# Altium PCB Project Dial MLB attiny.PcbDoc
Units mil, origin at the board's own origin, x right, y up, seen from the top; angles counter-clockwise.
Board outline 2539.04 x 2600.62 mil, 2 copper layers (Top Layer, Bottom Layer); 24 components, 15 nets, 74 pads, 38 vias.
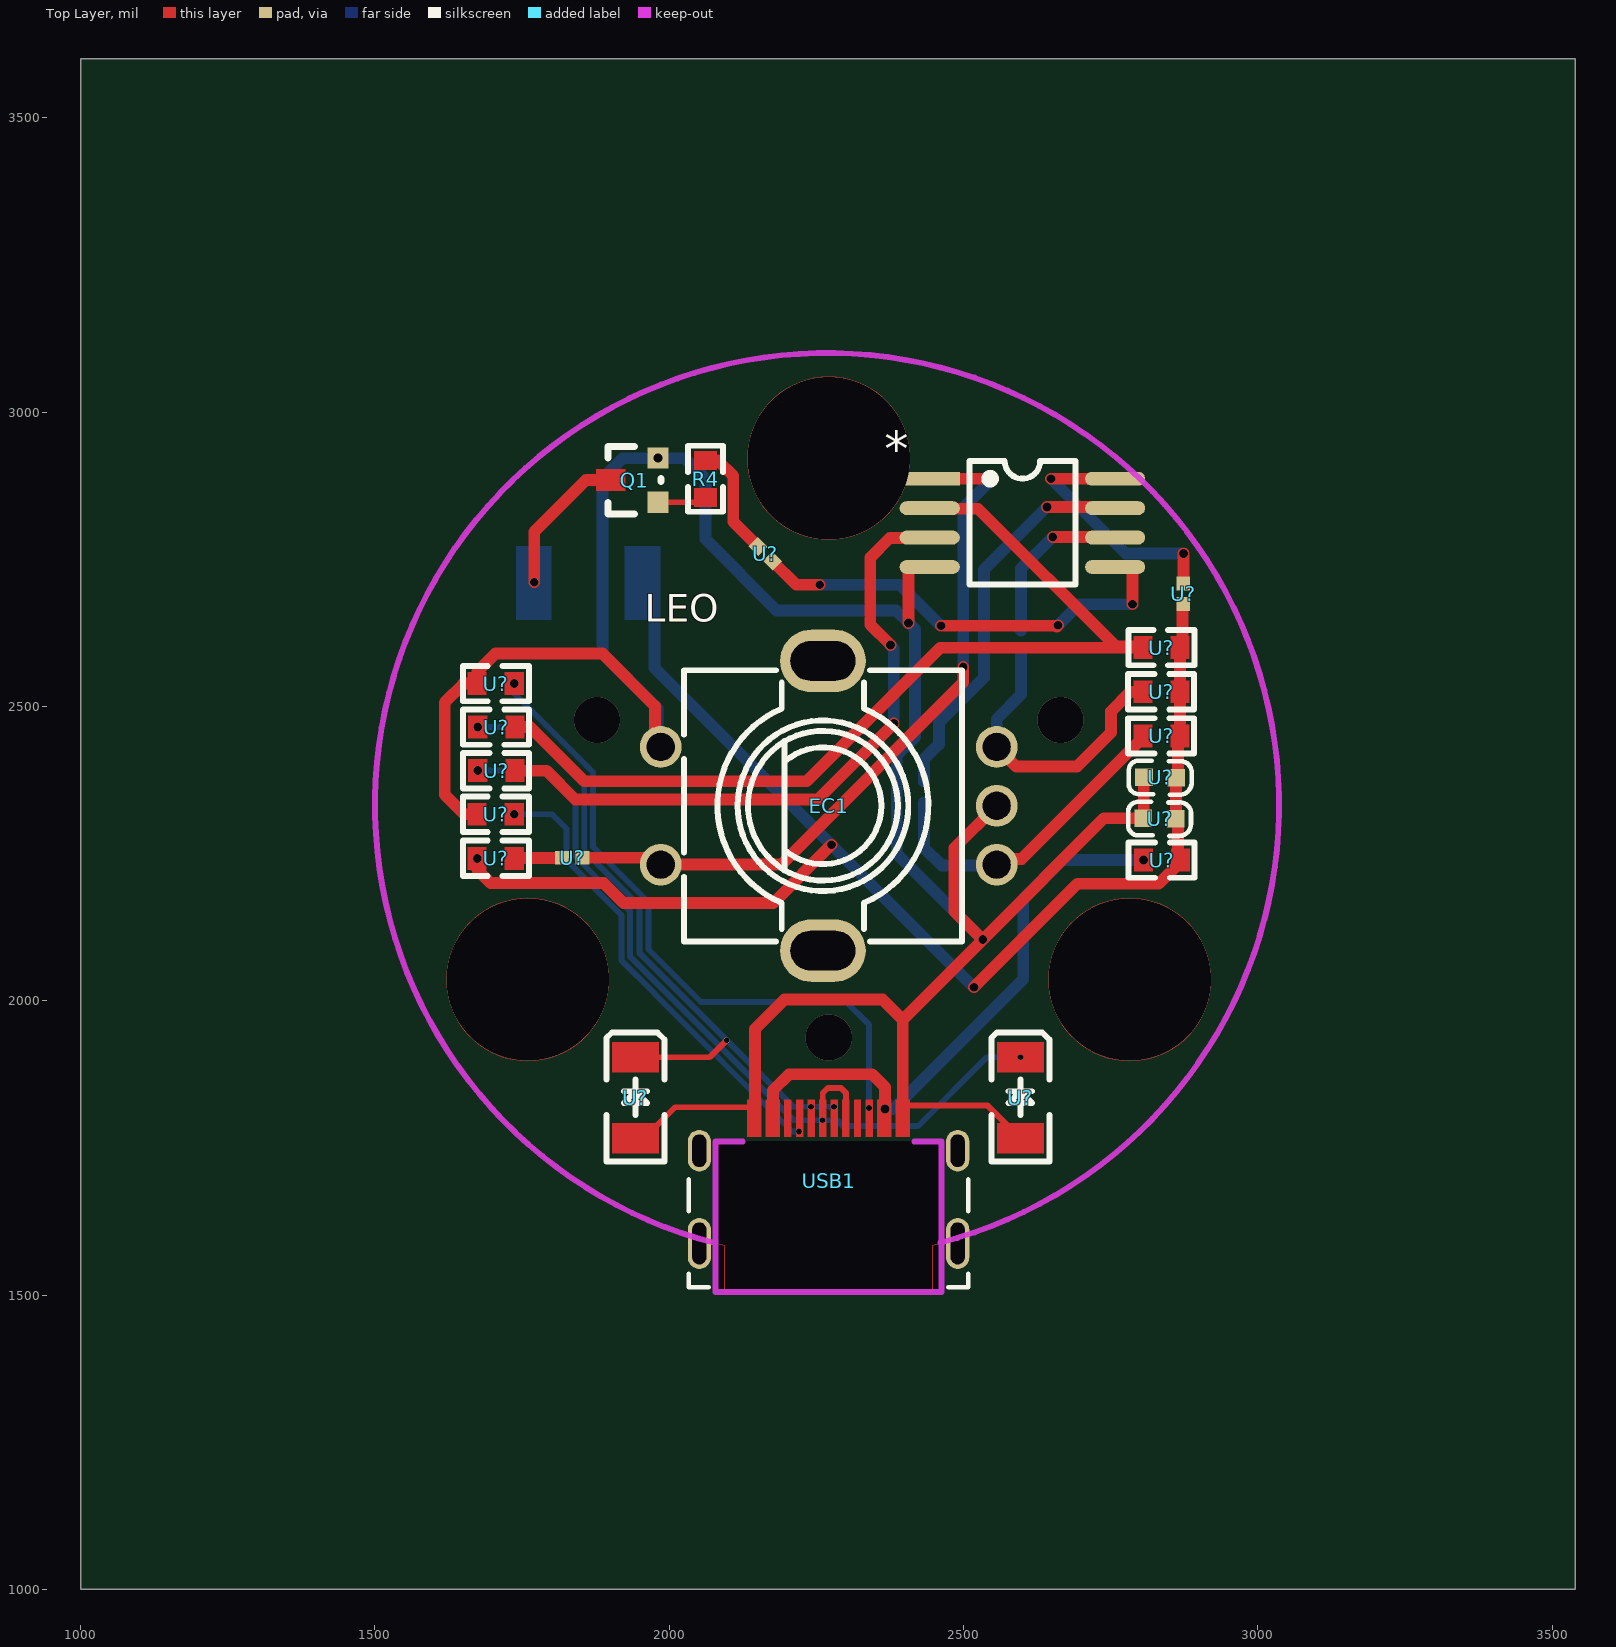
[diagram p0: Top Layer view]
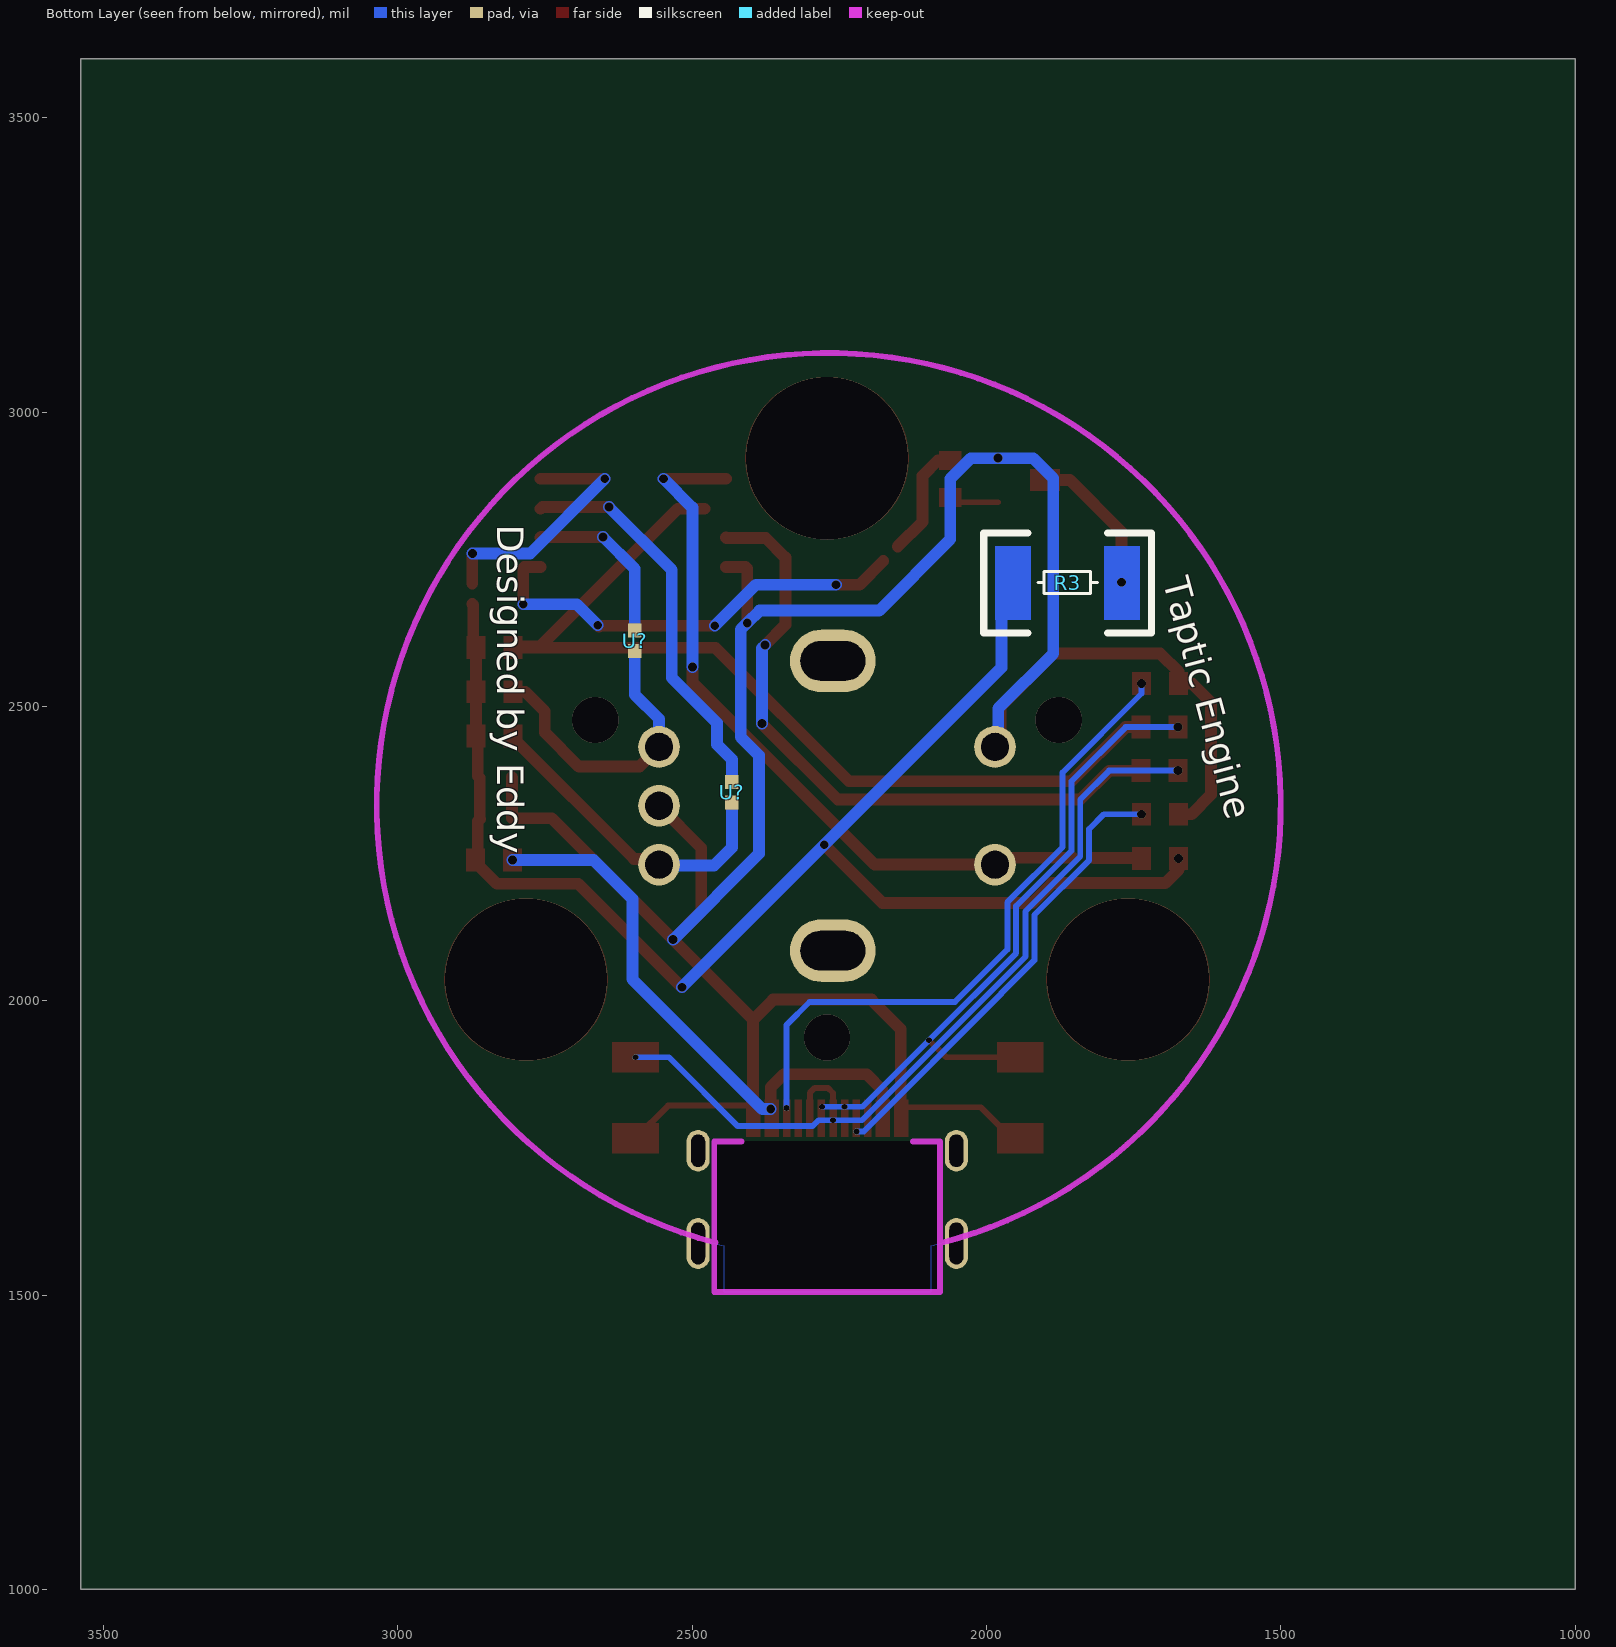
[diagram p1: Bottom Layer view, seen from below]

## Layer stack, top to bottom
Top Layer: signal copper (thickness not stored)
Dielectric: dielectric 12.6, FR-4, Dk 4.8
Bottom Layer: signal copper (thickness not stored)

## Board outline
3539.04,1000 1000,1000 1000,3600.62 3539.04,3600.62

## Components (designator, comment, footprint, x,y, rotation, side; value= is the part's Value field where it differs from the comment)
* "attiny85" SOP8W 2442.65,2886.96 r0 top
EC1 "EC11E1834403" SW-TH_EC11E1820402 2270.95,2331.29 r90 top
Q1 "S8050" SOT-23 1945.61,2881.95 r90 top
R3 "Taptic Engine" 1812R 1769.72,2709.95 r0 bottom
R4 "1K" 0603R 2061.61,2917.95 r270 top
U? "Comment" JUMPER 1802.61,2242.95 r90 top
U? "Comment" JUMPER 2140.01,2782.56 r45 top
U? "Comment" JUMPER 2873.61,2723.95 r0 top
U? "3.6 Zener" LL34 1942.61,1766.16 r90 top
U? "3.6 Zener" LL34 2596.61,1766.16 r90 top
U? "500ma" 0603R 2805.62,2238.95 r0 top
U? "5.1k" 0603R 1736.61,2316.95 r180 top
U? "5.1k" 0603R 1736.61,2538.95 r180 top
U? "4.7K" 0603R 2804.61,2449.95 r0 top
U? "4.7K" 0603R 1736.61,2241.95 r180 top
U? "4.7K" 0603R 2804.61,2524.95 r0 top
U? "1.5k" 0603R 2867.61,2599.95 r180 top
U? "66.5" 0603R 1674.61,2390.95 r0 top
U? "66.5" 0603R 1674.61,2464.95 r0 top
U? "4.7uF" 0603C 2805.4,2310.31 r0 top
U? "0.1uF" 0603C 2806.4,2380.31 r0 top
U? "Comment" JUMPER 2432.61,2386.95 r180 bottom
U? "Comment" JUMPER 2597.61,2578.95 r0 bottom
USB1 "TYPE_C" TYPE-C_A 2270.61,1632.95 r0 top

## Footprints (in the part's own frame and the unit in brackets; to place one, negate y for a bottom-side part, rotate by r counter-clockwise, add the part's x,y. Pads: shape width x height; smd on the part's side, far side on the other; paste and mask are expansions set on the pad)
0603C [mil]
  rect 30x30 smd: 1(0.21,-0.35) 2(55.21,-1.35)
  silkscreen extent -26,-30 81,28
0603R [mil]
  round 0 smd: 1(0,0) 2(62.99,0)
  Top Layer region: -15.75,19 15.75,19 15.75,-19 -15.75,-19
  Top Layer region: 47.24,19 78.74,19 78.74,-19 47.24,-19
  silkscreen extent -25,-30 87,30
1812R [mil]
  round 0 smd: 1(0,0) 2(185,0)
  Top Layer region: 155,-62.5 215,-62.5 215,62.5 155,62.5
  Top Layer region: -30,-62.5 30,-62.5 30,62.5 -30,62.5
  silkscreen extent -50,-85 235,85
JUMPER [mil]
  rect 23x23.62 smd: 1(0,-15) 2(0,-50)
LL34 [mm]
  round 0 smd: A(0,0) K(3.5,0)
  Top Layer region: -0.65,1 0.65,1 0.65,-1 -0.65,-1
  Top Layer region: 2.85,1 4.15,1 4.15,-1 2.85,-1
  silkscreen extent -1,-1.25 4.57,1.25
SOP8W [mm]
  rect 2.6x0.6 smd: 1(0,0)
  oval 2.598x0.6 smd: 2(0,-1.27) 3(0,-2.54) 4(0,-3.81) 5(8,-3.81) 6(8,-2.54) 7(8,-1.27) 8(8,0)
  silkscreen extent 1.71,-4.57 6.29,0.76
SOT-23 [mil]
  rect 36x36 smd: B(-35,-35) E(40,-35)
  round 0 smd: C(3,45)
  Top Layer region: -15,70 21,70 21,20 -15,20
  silkscreen extent -55,-40 60,50
SW-TH_EC11E1820402 [mm]
  round 1.8 hole 1.2 slot 1.205 at 0 deg: A(-2.54,-7.25) B(2.54,-7.25) C(0,-7.25) D(-2.54,7.25) E(2.54,7.25)
  oval 2.7x3.7 hole 1.7 slot 2.8 at 90 deg: F(6.25,0.25) G(-6.25,0.25)
  silkscreen extent -5.85,-5.75 5.85,6.25
TYPE-C_A [mm]
  oval 1x2.199 hole 0.6 slot 1.8 at 90 deg: 0(-5.575,-1.15) 0(5.575,-1.15)
  oval 1x1.799 hole 0.6 slot 1.4 at 90 deg: 0(-5.575,2.85) 0(5.575,2.85)
  round 0 smd: A1B12(-3.2,4.25) A4B9(-2.4,4.25) A5(-1.25,4.25) A6(-0.25,4.25) A7(0.25,4.25) A8(1.25,4.25) B1A12(3.2,4.25) B4A9(2.4,4.25) B5(1.75,4.25) B6(0.75,4.25) B7(-0.75,4.25) B8(-1.75,4.25)
  Top Layer region: -3.5,5.05 -2.9,5.05 -2.9,3.45 -3.5,3.45
  Top Layer region: -2.7,5.05 -2.1,5.05 -2.1,3.45 -2.7,3.45
  Top Layer region: 2.9,5.05 3.5,5.05 3.5,3.45 2.9,3.45
  Top Layer region: 2.1,5.05 2.7,5.05 2.7,3.45 2.1,3.45
  Top Layer region: -1.9,5.05 -1.6,5.05 -1.6,3.45 -1.9,3.45
  Top Layer region: -1.4,5.05 -1.1,5.05 -1.1,3.45 -1.4,3.45
  Top Layer region: 1.6,5.05 1.9,5.05 1.9,3.45 1.6,3.45
  Top Layer region: 1.1,5.05 1.4,5.05 1.4,3.45 1.1,3.45
  Top Layer region: 0.1,5.05 0.4,5.05 0.4,3.45 0.1,3.45
  Top Layer region: -0.4,5.05 -0.1,5.05 -0.1,3.45 -0.4,3.45
  Top Layer region: 0.6,5.05 0.9,5.05 0.9,3.45 0.6,3.45
  Top Layer region: -0.9,5.05 -0.6,5.05 -0.6,3.45 -0.9,3.45
  Keep-Out Layer lines w0.254: -3.7,3.25 -4.875,3.25 -4.875,-3.25 4.875,-3.25 4.875,3.25 3.7,3.25
  Multi-Layer board cut-out: -4.875,-3.25 4.875,-3.25 4.875,3.25 -4.875,3.25
  silkscreen extent -6.03,-3.05 6.03,1.61

## Via types
v1: diameter 15, hole 15, Top Layer to Bottom Layer, 25 vias
v2: diameter 10, hole 10, Top Layer to Bottom Layer, 7 vias
v3: diameter 78.74, hole 78.74, Top Layer to Bottom Layer, 3 vias
v4: diameter 275.59, hole 275.59, Top Layer to Bottom Layer, 3 vias

## Nets (pads, with @x,y where several pads share a name; then routed paths per layer and width w, separated by ;. In a path a pad name is that pad's centre, name@x,y a point inside that pad or via, vN(x,y) a via of type N, cw(c..) or ccw(c..) an arc to the next point about the centre after c; other vN are vias at no path point)
+5V: *.8 R3.2 U?.1@2867.6,2599.95 U?.1@2873.61,2708.95 U?.2@1673.61,2241.95 U?.2@2860.61,2308.95 U?.2@2861.61,2378.95 U?.2@2867.6,2449.95 U?.2@2867.6,2524.95 U?.2@2868.61,2238.95 U?.2@2873.61,2673.95 | length 2969.5
  Top Layer w20: v1(1673.61,2241.95) 1673.61,2222.95 1696.61,2199.95 1888.61,2199.95 1922.61,2165.95 2176.61,2165.95 v1(2275.61,2264.95) ; v1(2517.61,2022.95) 2693.61,2198.95 2831.86,2198.95 2868.61,2235.7 2868.61,2238.95 2864.61,2242.95 2864.61,2304.95 2860.61,2308.95 2861.11,2309.45 2861.11,2378.45 2861.61,2378.95 2864.61,2381.95 2864.61,2446.96 2867.61,2449.95 ; v1(2648.61,2886.95) *.8 ; 2867.61,2524.95 2867.61,2451.96 2868.61,2450.95 2868.11,2450.45 ; 2867.61,2525.95 2867.61,2599.95 2872.11,2604.46 2872.11,2672.45 U?.2@2873.61,2673.95 ; U?.1@2873.61,2708.95 v1(2873.61,2759.95)
  Bottom Layer w20: 1954.72,2669.06 R3.2 1974.72,2689.95 1974.72,2565.85 v1(2275.61,2264.95) v1(2517.61,2022.95) ; v1(2648.61,2886.95) 2775.61,2759.95 v1(2873.61,2759.95)
A1: *.1 EC1.D U?.1@1736.6,2241.95 U?.1@1817.61,2242.95 U?.2@1852.61,2242.95 | length 1357.1
  Top Layer w20: 1741.35,2237.12 1736.61,2241.87 1736.61,2241.95 1737.11,2242.45 1817.11,2242.45 U?.1@1817.61,2242.95 ; U?.2@1852.61,2242.95 1960.09,2242.95 1965.92,2237.12 1979.69,2237.12 EC1.D 2189.95,2231.29 2499.61,2540.95 v1(2499.61,2566.95) ; *.1 v1(2548.61,2886.95)
  Bottom Layer w20: EC1.D@1973.86,2242.95 EC1.D ; v1(2499.61,2566.95) 2499.61,2837.95 v1(2548.61,2886.95)
D0: *.6 EC1.B U?.1@2597.61,2593.95 U?.1@2804.61,2524.95 U?.2@2597.61,2628.95 | length 810
  Top Layer w20: EC1.B 2589.73,2397.95 2692.61,2397.95 2750.61,2455.95 2750.61,2491.95 2783.61,2524.95 2804.61,2524.95 ; v1(2651.61,2787.95) 2756.61,2787.95 *.6
  Bottom Layer w10: EC1.B@2551.61,2436.07 EC1.B
  Bottom Layer w20: EC1.B 2556.39,2478.73 2597.61,2519.95 U?.1@2597.61,2593.95 ; U?.2@2597.61,2628.95 2597.61,2733.95 v1(2651.61,2787.95)
D7: *.7 EC1.A U?.1@2432.61,2371.95 U?.1@2804.61,2449.95 U?.2@2432.61,2336.95 | length 1227.8
  Top Layer w20: EC1.A 2566.12,2241.03 2598.93,2241.03 2804.61,2446.7 2804.61,2449.95 ; v1(2641.61,2838.95) 2754.61,2838.95 *.7@2757.61,2835.95
  Bottom Layer w20: U?.2@2432.61,2336.95 2432.61,2260.17 2462.83,2229.95 2557.73,2229.95 EC1.A ; U?.1@2432.61,2371.95 2432.61,2409.95 2458.11,2435.45 2458.11,2472.45 2534.61,2548.95 2534.61,2731.95 v1(2641.61,2838.95)
D9: *.5 R4.1 U?.1@2150.61,2771.95 U?.2@2175.36,2747.2 | length 960.2
  Top Layer w20: R4.1 2082.61,2917.95 2108.61,2891.95 2108.61,2813.95 U?.1@2150.61,2771.95 ; U?.2@2175.36,2747.2 2215.61,2706.95 v1(2255.61,2706.95) ; v1(2461.61,2637.06) 2657.51,2637.06 2658.61,2635.95 v1(2660.61,2637.95) ; *.5 2785.31,2736.95 2786.98,2735.28 v1(2786.98,2673.58)
  Bottom Layer w20: v1(2255.61,2706.95) 2391.72,2706.95 v1(2461.61,2637.06) ; v1(2660.61,2637.95) 2696.24,2673.58 v1(2786.98,2673.58)
D+: U?.1@1674.61,2390.95 U?.K@2596.61,1903.95 USB1.A6 USB1.B6 | length 1455.1
  Top Layer w10: USB1.A6 2260.77,1843.11 2269.61,1851.95 2291.61,1851.95 2300.14,1843.42 USB1.B6
  Bottom Layer w10: v1(1674.61,2390.95) 1791.61,2390.95 1840.61,2341.95 1840.61,2244.95 1933.61,2151.95 1933.61,2074.95 2211.61,1796.95 v2(2260.61,1796.95) 2285.61,1796.95 2295.61,1786.95 2422.61,1786.95 2539.61,1903.95 v2(2596.61,1903.95)
D-: U?.1@1674.61,2464.95 U?.K@1942.61,1903.95 USB1.A7 USB1.B7 | length 1155.2
  Top Layer w10: 1942.61,1903.95 2068.61,1903.95 v2(2097.61,1932.95)
  Bottom Layer w10: v1(1674.61,2464.95) 1763.61,2464.95 1855.61,2372.95 1855.61,2254.95 1949.61,2160.95 1949.61,2080.95 v2(2097.61,1932.95) 2210.61,1819.95 v2(2279.61,1819.95)
  other v2: 2241.08,1819.95
GND: *.4 EC1.C EC1.E Q1.E U?.1@2805.61,2309.95 U?.1@2806.61,2379.95 U?.2@1673.62,2316.95 U?.2@1673.62,2538.95 U?.A USB1.A1B12 USB1.B1A12 | length 4654.6
  Top Layer w10: 1947.27,1770.82 1961.48,1770.82 2009.61,1818.95 2144.63,1818.95 ; 2398.41,1821.77 2541,1821.77 2596.61,1766.16
  Top Layer w20: 1673.62,2316.95 1651.61,2316.95 1618.61,2349.95 1618.61,2506.95 1650.61,2538.95 1673.62,2538.95 1673.62,2558.96 1704.61,2589.95 1886.61,2589.95 1975.79,2500.78 1975.79,2441.03 EC1.E ; 1942.61,1766.16 1947.27,1770.82 ; USB1.A1B12 2144.63,1818.95 ; 2145.61,1807.95 2145.61,1951.95 2195.61,2001.95 2362.58,2001.95 2396.6,1967.94 ; USB1.B1A12 2396.6,1819.96 ; 2398.41,1821.77 2396.6,1819.96 ; v1(2406.61,2641.95) 2406.61,2734.28 2409.29,2736.95 *.4 ; EC1.C 2484.61,2259.52 2484.61,2151.95 v1(2532.61,2103.95) ; U?.1@2806.61,2379.95 2806.11,2379.45 2806.11,2310.45 2805.61,2309.95 2738.61,2309.95 v1(2532.61,2103.95) ; 2396.6,1819.96 2396.6,1967.94 ; 2396.6,1967.94 v1(2532.61,2103.95)
  Bottom Layer w20: EC1.E 1979.85,2436.97 1979.85,2496.73 1886.61,2589.96 1886.61,2887.95 1920.61,2921.95 v1(1980.61,2921.95) 2026.61,2921.95 2061.61,2886.95 2061.61,2783.95 2182.61,2662.95 2385.61,2662.95 v1(2406.61,2641.95) 2417.61,2630.95 2417.61,2447.95 2386.61,2416.95 2386.61,2249.95 v1(2532.61,2103.95)
NETF1_1: U?.1@2805.62,2238.95 USB1.A4B9 USB1.B4A9 | length 989.2
  Top Layer w20: USB1.A4B9 2176.12,1847.46 2203.61,1874.95 2344.61,1874.95 2366.61,1852.95 v1(2366.61,1815.95)
  Bottom Layer w20: v1(2366.61,1815.95) 2380.78,1815.95 2601.61,2036.79 2601.61,2172.95 2667.61,2238.95 v1(2805.62,2238.95)
NETQ1_B: Q1.B R4.2 | length 84.3
  Top Layer w10: Q1.B 2053.61,2846.95 R4.2
NETQ1_C: Q1.C R3.1 | length 252.5
  Top Layer w20: v1(1770.61,2710.95) 1770.61,2796.95 1858.61,2884.95 Q1.C
NETR9_1: U?.1@1736.61,2538.95 USB1.B5 | length 1115.3
  Bottom Layer w10: v1(1736.61,2538.95) 1736.61,2521.95 1870.61,2387.95 1870.61,2261.17 1964.61,2167.17 1964.61,2087.17 2053.83,1997.95 2300.61,1997.95 2339.61,1958.95 v2(2339.61,1817.95)
NETR10_1: U?.1@1736.61,2316.95 USB1.A5 | length 784
  Bottom Layer w10: v1(1736.61,2316.95) 1800.61,2316.95 1825.61,2291.95 1825.61,2238.74 1918.61,2145.74 1918.61,2068.74 1975.61,2011.74 1975.61,2010.95 2208.61,1777.95 v2(2220.61,1777.95)
PB3: *.2 U?.2@1737.6,2464.95 U?.2@2804.61,2599.95 | length 1617.6
  Top Layer w20: 1737.61,2464.95 1763.61,2464.95 1855.61,2372.95 2233.61,2372.95 2460.61,2599.95 2804.61,2599.95 ; *.2@2479.08,2835.95 2524.61,2835.95 2758.61,2601.95 2800.61,2601.95
PB4: *.3 U?.2@1737.6,2390.95 | length 1131.4
  Top Layer w20: 1737.61,2390.95 1791.61,2390.95 1840.61,2341.95 2252.61,2341.95 v1(2381.61,2470.95) ; v1(2376.11,2604.45) 2341.61,2638.95 2341.61,2752.95 2374.92,2786.26 2441.96,2786.26 *.3
  Bottom Layer w20: v1(2376.11,2604.45) 2381.61,2598.95 v1(2381.61,2470.95)
pads on no net: EC1.F EC1.G USB1.0 USB1.A8 USB1.B8
copper on no net: | length 2596.9
  Top Layer w0.5: 1897.31,2035.87 cw(c1759.52,2036.04) 1897.31,2036.01 ; 2408.74,2921.7 cw(c2270.95,2921.86) v4@2408.74,2921.84 ; 2920.18,2035.87 cw(c2782.38,2036.04) v4@2920.18,2036.01
  other v3: 2270.95,1937.59 1877.25,2476.96 2664.65,2476.96
  other v4: 1759.51,2036.01 2782.38,2036.01 2270.95,2921.84

## Polygon pours and split planes (outlines as drawn)
GND on Bottom Layer (solid): 453 vertices, not listed, extent 1502.87,1505.95 3039.04,3099.38
GND on Top Layer (solid): 453 vertices, not listed, extent 1502.87,1505.95 3039.04,3099.38

## Keep-outs
Keep-Out Layer:
  lines w10: 2078.98,1588.09 cw(c2268.09,2332.53) 2460.76,1589

## Silkscreen, mask and mechanical layers (free items; w line width, h text height)
Top Overlay:
  text "LEO" at 1958.61,2628.95 h80
Bottom Overlay:
  text "Designed by Eddy" at 2831.11,2808.95 h45 r90
  text "Taptic Engine" at 1700.35,2713.13 h45 r75
Document:
  lines w0.1: 2268.52,2299.31 2270.52,2301.31